# Altium PCB PCB1.PcbDoc
Units mil, origin at the board's own origin, x right, y up, seen from the top; angles counter-clockwise.
Board outline 1515 x 2470 mil, 4 copper layers (Top Layer, GND, VCC, Bottom Layer), stack 23.756 mil thick; 65 components, 50 nets, 226 pads, 151 vias.
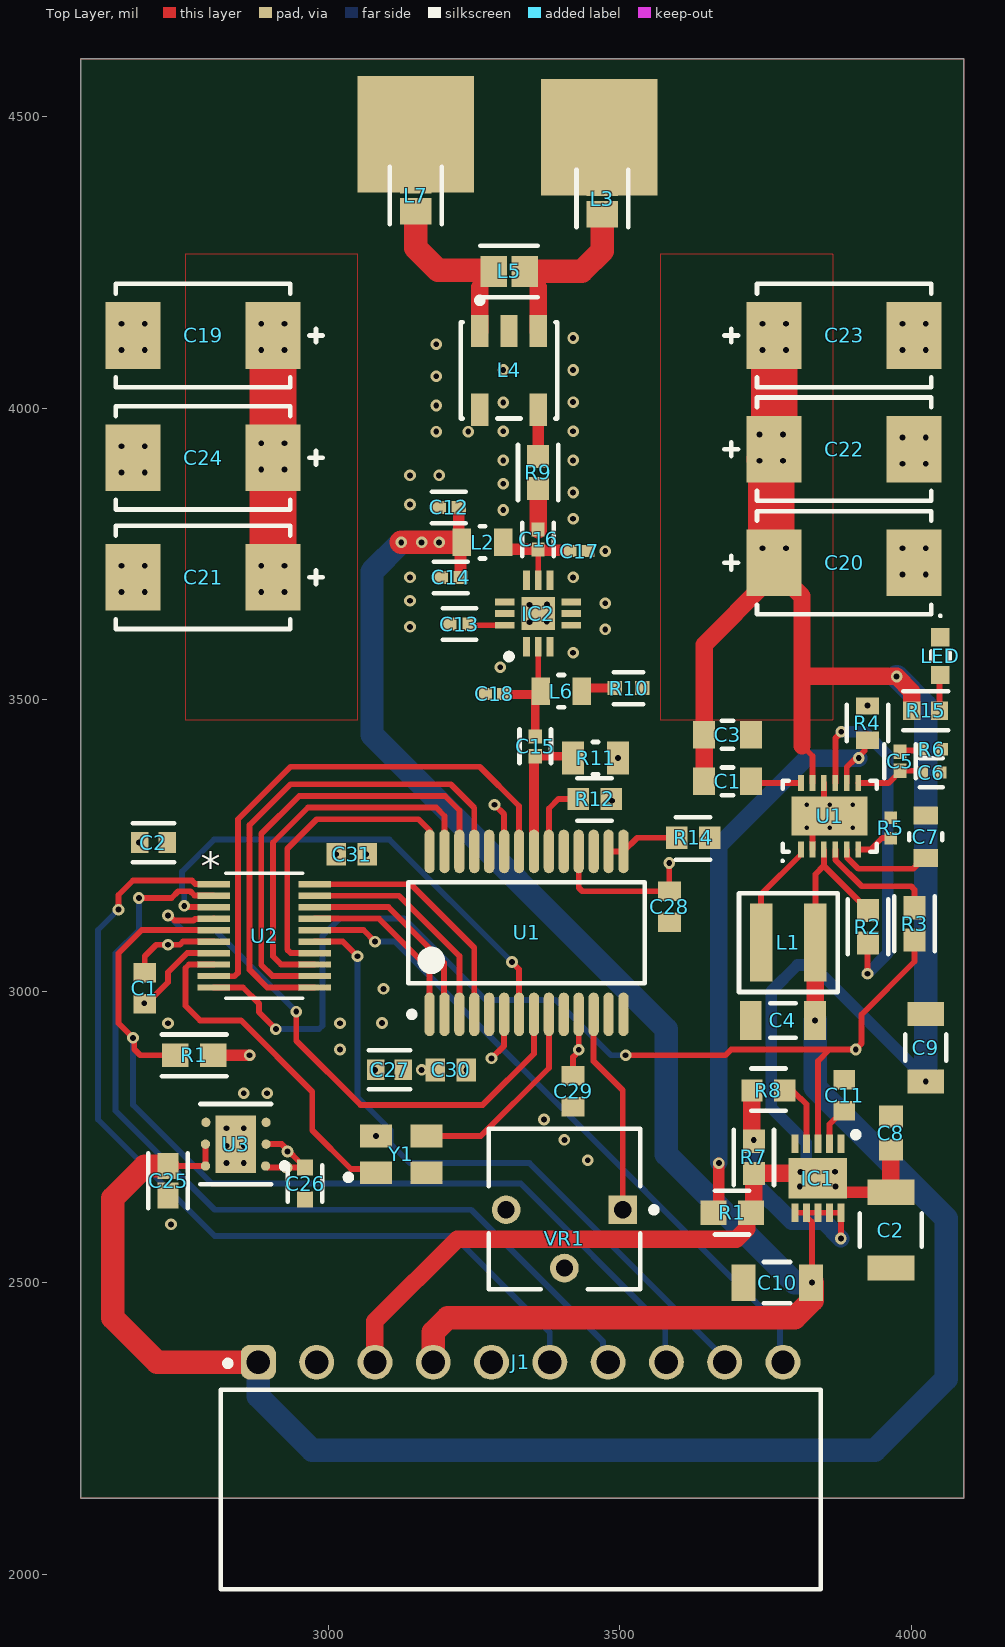
[diagram p0: Top Layer view]
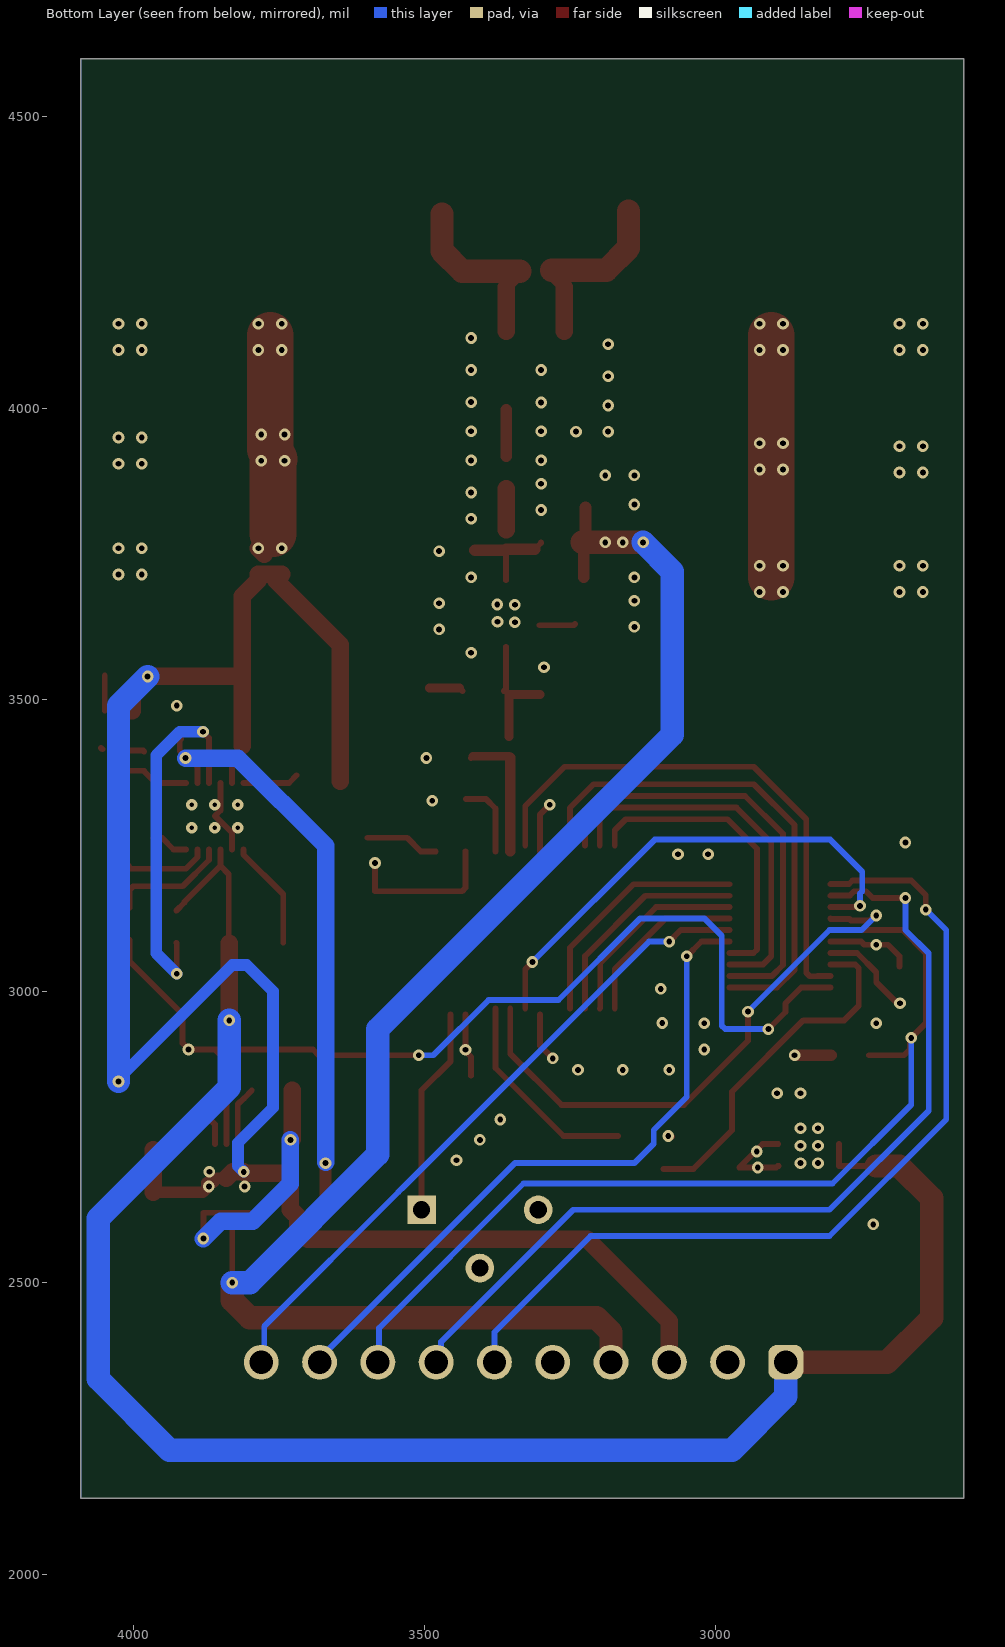
[diagram p1: Bottom Layer view, seen from below]

## Layer stack, top to bottom
Top Solder: solder mask 0.4, Solder Resist, Dk 3.5
Top Layer: signal copper 1.4
Dielectric 2: prepreg 2.8, PP-006, Dk 4.1
GND: signal copper 1.378
Dielectric 1: dielectric 12.6, FR-4, Dk 4.8
VCC: signal copper 1.378
Dielectric 3: prepreg 2.8, PP-006, Dk 4.1
Bottom Layer: signal copper 1.4
Bottom Solder: solder mask 0.4, Solder Resist, Dk 3.5

## Board outline
2575,2130 2575,4600 4090,4600 4090,2130

## Design rules (kind name [scope] priority, off if disabled: settings)
AssemblyTestPointUsage [All] p0: scope1count=1 scope1_0_kind=Board scope1_0_value=Board scope2count=1 scope2_0_kind=Board scope2_0_value=Board commentlength=0
AssemblyTestpoint [All] p0: scope1count=1 scope1_0_kind=Board scope1_0_value=Board scope2count=1 scope2_0_kind=Board scope2_0_value=Board commentlength=0
Clearance [All] p0: scope1count=1 scope1_0_kind=Board scope1_0_value=Board scope2count=1 scope2_0_kind=Board scope2_0_value=Board commentlength=0 gap=10
Clearance [All] p1: gap=10 ignorepadtopadclearanceinfootprint=FALSE except(0: Arc-Hole Track-Hole SMDPad-Hole THPad-Hole Via-Hole Fill-Hole Poly-Hole Region-Hole Text-Hole; 2: SMDPad-SMDPad; 5: Arc-Arc Arc-Track Arc-SMDPad Track-Track Track-SMDPad; 20: Arc-Fill Arc-Poly Arc-Region Track-Fill Track-Poly Track-Region Fill-Fill Fill-Poly Fill-Region Poly-Poly Poly-Region Region-Region)
ComponentClearance [All] p0: scope1count=1 scope1_0_kind=Board scope1_0_value=Board scope2count=1 scope2_0_kind=Board scope2_0_value=Board commentlength=0 gap=10 collisioncheckmode=3
DiffPairsRouting [All] p0: scope1count=1 scope1_0_kind=Board scope1_0_value=Board scope2count=1 scope2_0_kind=Board scope2_0_value=Board commentlength=0
FabricationTestPointUsage [All] p0: scope1count=1 scope1_0_kind=Board scope1_0_value=Board scope2count=1 scope2_0_kind=Board scope2_0_value=Board commentlength=0 valid=0 allowmultiple=FALSE
FabricationTestpoint [All] p0: scope1count=1 scope1_0_kind=Board scope1_0_value=Board scope2count=1 scope2_0_kind=Board scope2_0_value=Board commentlength=0 side=3 testpointundercomponent=TRUE minsize=40 maxsize=100 preferedsize=60 minholesize=0 maxholesize=40 preferedholesize=32 testpointgrid=1
FanoutControl Fanout_BGA [All] p0 off: scope1count=1 scope1_0_kind=Board scope1_0_value=Board scope2count=1 scope2_0_kind=Board scope2_0_value=Board commentlength=69 // Protel DXP Scope 1 Expression Was: IsBGA   Fanout_BGA (Default Rule)
FanoutControl Fanout_LCC [All] p0 off: scope1count=1 scope1_0_kind=Board scope1_0_value=Board scope2count=1 scope2_0_kind=Board scope2_0_value=Board commentlength=69 // Protel DXP Scope 1 Expression Was: IsLCC   Fanout_LCC (Default Rule)
FanoutControl Fanout_SOIC [All] p0 off: scope1count=1 scope1_0_kind=Board scope1_0_value=Board scope2count=1 scope2_0_kind=Board scope2_0_value=Board commentlength=71 // Protel DXP Scope 1 Expression Was: IsSOIC   Fanout_SOIC (Default Rule)
FanoutControl Fanout_Small [All] p0 off: scope1count=1 scope1_0_kind=Board scope1_0_value=Board scope2count=1 scope2_0_kind=Board scope2_0_value=Board commentlength=84 // Protel DXP Scope 1 Expression Was: (CompPinCount < 5)   Fanout_Small (Default Rule)
FanoutControl Fanout_Default [All] p0: scope1count=1 scope1_0_kind=Board scope1_0_value=Board scope2count=1 scope2_0_kind=Board scope2_0_value=Board commentlength=30 // Fanout_Default (Default Rule)
Height [All] p0: scope1count=1 scope1_0_kind=Board scope1_0_value=Board scope2count=1 scope2_0_kind=Board scope2_0_value=Board commentlength=0
HoleSize [All] p0: scope1count=1 scope1_0_kind=Board scope1_0_value=Board scope2count=1 scope2_0_kind=Board scope2_0_value=Board commentlength=0 absolutevalues=TRUE maxlimit=100 minlimit=1 maxpercent=80.000 minpercent=20.000
HoleToHoleClearance [All] p0: scope1count=1 scope1_0_kind=Board scope1_0_value=Board scope2count=1 scope2_0_kind=Board scope2_0_value=Board commentlength=0
LayerPairs [All] p0: scope1count=1 scope1_0_kind=Board scope1_0_value=Board scope2count=1 scope2_0_kind=Board scope2_0_value=Board commentlength=0 enforce=TRUE
MinimumSolderMaskSliver [All] p0: scope1count=1 scope1_0_kind=Board scope1_0_value=Board scope2count=1 scope2_0_kind=Board scope2_0_value=Board commentlength=0
NetAntennae [All] p0: scope1count=1 scope1_0_kind=Board scope1_0_value=Board scope2count=1 scope2_0_kind=Board scope2_0_value=Board commentlength=0
PasteMaskExpansion [All] p0: scope1count=1 scope1_0_kind=Board scope1_0_value=Board scope2count=1 scope2_0_kind=Board scope2_0_value=Board commentlength=0 expansion=0
PlaneClearance [All] p0: scope1count=1 scope1_0_kind=Board scope1_0_value=Board scope2count=1 scope2_0_kind=Board scope2_0_value=Board commentlength=0 clearance=40
PlaneClearance [All] p1: clearance=40
PlaneConnect [All] p0: scope1count=1 scope1_0_kind=Board scope1_0_value=Board scope2count=1 scope2_0_kind=Board scope2_0_value=Board commentlength=0 planeconnectstyle=Relief reliefexpansion=20 reliefentries=4 reliefconductorwidth=10 reliefairgap=10
PolygonConnect [All] p0: scope1count=1 scope1_0_kind=Board scope1_0_value=Board scope2count=1 scope2_0_kind=Board scope2_0_value=Board commentlength=0 connectstyle=Direct reliefconductorwidth=10 reliefentries=4 polygonreliefangle="90 Angle"
PolygonConnect [All] p1: connectstyle=Direct reliefconductorwidth=10 reliefentries=4 polygonreliefangle="90 Angle" airgapwidth=10
RoutingCorners [All] p0: scope1count=1 scope1_0_kind=Board scope1_0_value=Board scope2count=1 scope2_0_kind=Board scope2_0_value=Board commentlength=0 cornerstyle=45-Degree minsetback=100 maxsetback=100
RoutingLayers [All] p0: scope1count=1 scope1_0_kind=Board scope1_0_value=Board scope2count=1 scope2_0_kind=Board scope2_0_value=Board commentlength=0 top layer=Automatic mid layer 1=Automatic mid layer 2=Automatic bottom layer=Automatic
RoutingPriority [All] p0: scope1count=1 scope1_0_kind=Board scope1_0_value=Board scope2count=1 scope2_0_kind=Board scope2_0_value=Board commentlength=0
RoutingTopology [All] p0: scope1count=1 scope1_0_kind=Board scope1_0_value=Board scope2count=1 scope2_0_kind=Board scope2_0_value=Board commentlength=0 topology=Shortest
RoutingVias [All] p0: scope1count=1 scope1_0_kind=Board scope1_0_value=Board scope2count=1 scope2_0_kind=Board scope2_0_value=Board commentlength=0 holewidth=28 width=50 viastyle="Through Hole" minholewidth=28 minwidth=50 maxholewidth=28 maxwidth=50
RoutingVias [All] p1: holewidth=28 width=50 viastyle="Through Hole" minholewidth=28 minwidth=50 maxholewidth=28 maxwidth=50
ShortCircuit [All] p0: scope1count=1 scope1_0_kind=Board scope1_0_value=Board scope2count=1 scope2_0_kind=Board scope2_0_value=Board commentlength=0 allowed=FALSE
SilkToBoardRegionClearance [All] p0: scope1count=1 scope1_0_kind=Board scope1_0_value=Board scope2count=1 scope2_0_kind=Board scope2_0_value=Board commentlength=0
SilkToSilkClearance [All] p0: scope1count=1 scope1_0_kind=Board scope1_0_value=Board scope2count=1 scope2_0_kind=Board scope2_0_value=Board commentlength=0
SilkToSolderMaskClearance [All] p0 off: scope1count=1 scope1_0_kind=Board scope1_0_value=Board scope2count=1 scope2_0_kind=Board scope2_0_value=Board commentlength=44 // Protel DXP Scope 1 Expression Was: IsPad
SolderMaskExpansion [All] p0: scope1count=1 scope1_0_kind=Board scope1_0_value=Board scope2count=1 scope2_0_kind=Board scope2_0_value=Board commentlength=0 expansion=4
SolderMaskExpansion [All] p1: expansion=4 istentingtop=FALSE
UnRoutedNet [All] p0: scope1count=1 scope1_0_kind=Board scope1_0_value=Board scope2count=1 scope2_0_kind=Board scope2_0_value=Board commentlength=0
UnpouredPolygon [All] p0: scope1count=1 scope1_0_kind=Board scope1_0_value=Board scope2count=1 scope2_0_kind=Board scope2_0_value=Board commentlength=0
Width [All] p0: scope1count=1 scope1_0_kind=Board scope1_0_value=Board scope2count=1 scope2_0_kind=Board scope2_0_value=Board commentlength=0 maxlimit=80 minlimit=10 preferedwidth=10
Width [All] p1: maxlimit=80 minlimit=10 preferedwidth=10
29 further rules are at their usual default settings.

## Classes and differential pairs
component class U_MCU+DDS: C1 C2 C27 C28 C29 C30 C31 R1 R14 U1 U2 VR1 Y1
component class System: J1 R11 R12
component class U_Power: C1 C2 C3 C4 C5 C6 C7 C8 C9 C10 C11 C19 C20 C21 C22 C23 C24 C25 C26 IC1 L1 LED R1 R2 R3 R4 R5 R6 R7 R8 R15 U1 U3
component class U_PA: C12 C13 C14 C15 C16 C17 C18 IC2 L2 L3 L4 L5 L6 L7 R9 R10

## Components (designator, comment, footprint, x,y, rotation, side; value= is the part's Value field where it differs from the comment)
C1 "CGA3E2X7R1H104K080AE" FP-CGA3E-0_3-0_1-IPC_A 3685,3360 r0 top
C1 "VJ0603Y104KXJAP" CAPC1608X92X38NL15T08 2685,3005 r90 top
C2 "GRM32ER61E226KE15L" FP-GRM32-MFG 3965,2590.04 r270 top
C2 "C0603C106M8PACTU" FP-C0603C106M8PACTU-MFG 2700,3255 r0 top
C3 "CGA3E1X7R1E105K080AC" FP-CGA3E-0_3-0_1-IPC_A 3685,3440 r0 top
C4 "CAP 10uF 10V 1206(3216)" CAPC1206(3216)190_L 3780,2950 r0 top
C5 "C1005X7R1H331K050BA" FP-C1005-050-0_05-IPC_B 3980.79,3394.63 r90 top
C6 "C0402C100J5GACTU" FP-C0402-BB-MFG 4034.25,3375 r0 top
C7 "C2012X5R1E475K125AB" FP-C2012-125-0_2-MFG 4025,3265 r90 top
C8 "GRM188R71E105KA12D" CAPC1608X90X35ML10T15 3965,2756.46 r270 top
C9 "GRM31CR71E106KA12L" FP-GRM31C-0_2-e0_3_0_8-MFG 4025,2903.07 r90 top
C10 "GRM31CR71E106KA12L" FP-GRM31C-0_2-e0_3_0_8-MFG 3770,2500 r180 top
C11 "DNP" CAPC1608X90X35NL10T15 3885,2821.57 r270 top
C12 "GRM155R71H104KE14D" FP-GRM155-0_05-IPC_B 3206.87,3830 r0 top
C13 "GRM155R71H104KE14D" FP-GRM155-0_05-IPC_B 3225,3630 r0 top
C14 "GRM1555C1H102JA01D" FP-GRM155-0_05-IPC_B 3210,3710 r0 top
C15 "GRM1555C1H102JA01D" FP-GRM155-0_05-IPC_B 3355,3420 r90 top
C16 "GRM1555C1H102JA01D" FP-GRM155-0_05-IPC_B 3360,3775 r90 top
C17 "GRM1555C1HR40WA01D" CAPC1005X55X25LL05T10 3430.35,3755 r180 top
C18 "GRM1555C1HR40WA01D" CAPC1005X55X25LL05T10 3285,3510 r0 top
C19 "16TQC220MD3" FP-POSCAP-D3L-MFG 2785,4125 r0 top
C20 "16TQC220MD3" FP-POSCAP-D3L-MFG 3885,3735 r180 top
C21 "16TQC220MD3" FP-POSCAP-D3L-MFG 2785,3710 r0 top
C22 "16TQC220MD3" FP-POSCAP-D3L-MFG 3885,3930 r180 top
C23 "16TQC220MD3" FP-POSCAP-D3L-MFG 3885,4125 r180 top
C24 "16TQC220MD3" FP-POSCAP-D3L-MFG 2785,3915 r0 top
C25 "C1608X5R1H105K080AB" FP-C1608-080-0_1-IPC_B 2725,2674.78 r270 top
C26 "C1608X5R1A106K080AC" FP-C1608-080-0_1-MFG 2960,2670 r90 top
C27 "C0603C106M8PACTU" FP-C0603C106M8PACTU-MFG 3105,2865 r0 top
C28 "VJ0603Y104KXJAP" CAPC1608X92X38NL15T08 3585,3145 r90 top
C29 "VJ0603Y104KXJAP" CAPC1608X92X38NL15T08 3420,2828.43 r90 top
C30 "VJ0603Y104KXJAP" CAPC1608X92X38NL15T08 3210,2865 r0 top
C31 "VJ0603Y104KXJAP" CAPC1608X92X38NL15T08 3040,3235 r0 top
IC1 "MP5000ADQ-LF-P" SON50P300X300X100-11N-D 3840,2679.06 r270 top
IC2 "PMA3-43-1W+" QFN51P300X300X89-13N 3360.08,3647.91 r90 top
J1 "613010143121" 613010143121 3330,2145 r0 top
L1 "XAL4030-472MEC" FP-XAL4030-472MEC-MFG 3789.13,3083.23 r180 top
L2 "LQW21HN1R5J00L" FP-LQW21HN_00-MFG 3264.57,3770 r180 top
L3 "MLZ2012M1R0HTD25" FP-MLZ2012-1_25-IPC_C 3470,4360 r90 top
L4 "MABAES0060" FP-MABAES0060-MFG 3310,4065 r90 top
L5 "MLZ2012M1R0HTD25" FP-MLZ2012-1_25-IPC_C 3310,4235 r0 top
L6 "LQW21HN1R5J00L" FP-LQW21HN_00-MFG 3399.57,3515 r180 top
L7 "MLZ2012M1R0HTD25" FP-MLZ2012-1_25-IPC_C 3150,4365 r270 top
LED "XZCM2CRK53WA-8VF" XZCFBB53W8VF 4050,3575 r270 top
R1 "CRCW06031M02FKEA" FP-CRCW0603-e3-IPC_A 3692.9,2620 r0 top
R1 "ESR03EZPF3301" FP-ESR03-IPC_A 2770,2890 r0 top
R2 "RMCF0603ZG0R00" FP-RMCF0603-IPC_B 3925.79,3110.63 r270 top
R3 "RMCF0603ZG0R00" FP-RMCF0603-IPC_B 4005.79,3115.63 r90 top
R4 "CRCW0603113KFKEC" FP-CRCW0603-e3-MFG 3925,3460 r270 top
R5 "ERJ-2RKF5762X" RESC1005X40X25NL05T05 3965,3280 r270 top
R6 "CRCW040286K6FKED" RESC1005X40X25NL05T05 4035,3415 r180 top
R7 "DNP" FP-RMCF0603-IPC_B 3730,2715 r90 top
R8 "CRCW060322R0FKEA" FP-CRCW0603-e3-IPC_B 3755,2830 r180 top
R9 "RMCF0603ZG0R00" FP-RMCF0603-IPC_B 3360,3890 r90 top
R10 "FCHP0402E50R0BBT1" FP-FC0402-MFG 3515,3520 r180 top
R11 "CRCW080550R0FKTA" FP-D12-CRCW0805-MFG 3458.39,3400 r0 top
R12 "CRCW060325R0FKEA" FP-CRCW0603-e3-IPC_B 3456.83,3330 r0 top
R14 "100Ohm 0603" FP-CRCW0603-e3-IPC_B 3625.91,3263.25 r0 top
R15 "TFCR0603-10W-E-5001BT" FP-TFCR0603-IPC_C 4024.92,3481.11 r180 top
U1 "AD9850BRSZ-REEL" ADI-RS-28_N 3340,3100 r90 top
U1 "LTC3122EDE#PBF" LT-DE-UE-12_V 3860,3300.31 r90 top
U2 "MSPM0C1104SDGS20R" DGS0020A_TEX 2890,3095 r0 top
U3 "LD39200PU33R" FP-DFN6-7946637-MFG 2841.18,2737.6 r180 top
VR1 "3362P-1-103LF" BOUR-3362P 3405,2626.38 r180 top
Y1 "830207044109" WE-SPXO_CFPS-39 3125,2720 r0 top

## Footprints (in the part's own frame and the unit in brackets; to place one, negate y for a bottom-side part, rotate by r counter-clockwise, add the part's x,y. Pads: shape width x height; smd on the part's side, far side on the other; paste and mask are expansions set on the pad)
613010143121 [mm] "Socket Header, Pitch 2.54 mm, THT, Angled, single row, 10p"
  rrect50% 1.52x1.52 hole 1.02: 1(-11.43,5.55)
  round 1.52 hole 1.02: 2(-8.89,5.55) 3(-6.35,5.55) 4(-3.81,5.55) 5(-1.27,5.55) 6(1.27,5.55) 7(3.81,5.55) 8(6.35,5.55) 9(8.89,5.55) 10(11.43,5.55)
  silkscreen extent -13.08,-4.35 13.08,5.62
ADI-RS-28_N [mm] "SOP, 28-Leads, Body 10.2x5.3mm, Pitch 0.65mm, IPC Medium Density"
  oval 1.9x0.45 smd: 1(-3.55,4.225) 2(-3.55,3.575) 3(-3.55,2.925) 4(-3.55,2.275) 5(-3.55,1.625) 6(-3.55,0.975) 7(-3.55,0.325) 8(-3.55,-0.325) 9(-3.55,-0.975) 10(-3.55,-1.625) 11(-3.55,-2.275) 12(-3.55,-2.925) 13(-3.55,-3.575) 14(-3.55,-4.225) 15(3.55,-4.225) 16(3.55,-3.575) 17(3.55,-2.925) 18(3.55,-2.275) 19(3.55,-1.625) 20(3.55,-0.975) 21(3.55,-0.325) 22(3.55,0.325) 23(3.55,0.975) 24(3.55,1.625) 25(3.55,2.275) 26(3.55,2.925) 27(3.55,3.575) 28(3.55,4.225)
  silkscreen extent -3.67,-5.15 2.2,5.15
BOUR-3362P [mm] "THD, 3-Leads, Body 6.6x6.99mm, Pitch 2.54mm"
  rect 1.25x1.25 hole 0.75: 1(-2.54,0.035)
  round 1.25 hole 0.75: 2(0,2.575) 3(2.54,0.035)
  silkscreen extent -4.03,-3.49 3.3,3.5
CAPC1005X55X25LL05T10 [mm] "Chip Capacitor, 2-Leads, Body 1.00x0.50mm, IPC High Density"
  rect 0.56x0.52 smd: 1(-0.39,0) 2(0.39,0)
CAPC1206(3216)190_L [mm] "Chip Capacitor, Body 3.2x1.6mm, Height 1.9mm, IPC High Density"
  rect 0.95x1.7 smd: 1(-1.4,0) 2(1.4,0)
  silkscreen extent -0.55,-0.75 0.55,0.75
CAPC1608X90X35ML10T15 [mm] "Chip Capacitor, 2-Leads, Body 1.60x0.80mm, IPC Low Density"
  rect 0.95x1.05 smd: 1(-0.725,0) 2(0.725,0)
CAPC1608X90X35NL10T15 [mm] "Chip Capacitor, 2-Leads, Body 1.60x0.80mm, IPC Medium Density"
  rect 0.85x0.95 smd: 1(-0.675,0) 2(0.675,0)
CAPC1608X92X38NL15T08 [mm] "Chip Capacitor, 2-Leads, Body 1.60x0.80mm, IPC Medium Density"
  rect 0.85x1 smd: 1(-0.675,0) 2(0.675,0)
DGS0020A_TEX [mil]
  rect 56x11 smd paste+0 mask+0: 1(-86.5,88.58) 2(-86.5,68.9) 3(-86.5,49.21) 4(-86.5,29.53) 5(-86.5,9.84) 6(-86.5,-9.84) 7(-86.5,-29.53) 8(-86.5,-49.21) 9(-86.5,-68.9) 10(-86.5,-88.58) 11(86.5,-88.58) 12(86.5,-68.9) 13(86.5,-49.21) 14(86.5,-29.53) 15(86.5,-9.84) 16(86.5,9.84) 17(86.5,29.53) 18(86.5,49.21) 19(86.5,68.9) 20(86.5,88.58)
  silkscreen extent -66,-108 66,108
FP-C0402-BB-MFG [mm]
  rect 0.52x0.52 smd paste+0 mask+0: 1(-0.4,0) 2(0.4,0)
  silkscreen extent -0.5,-0.64 0.5,0.64
FP-C0603C106M8PACTU-MFG [mm]
  rect 0.75x0.9 smd paste+0 mask+0: 1(-0.6,0) 2(0.6,0)
  silkscreen extent -0.9,-0.85 0.9,0.85
FP-C1005-050-0_05-IPC_B [mil]
  rect 25.17x22.54 smd paste+0 mask+0: 1(-16.4,0) 2(16.4,0)
  silkscreen extent -29,-27 29,27
FP-C1608-080-0_1-IPC_B [mil]
  rect 44.53x35.91 smd paste+0 mask+0: 1(-25.22,0) 2(25.22,0)
  silkscreen extent -47,-34 47,34
FP-C1608-080-0_1-MFG [mm]
  rect 0.7x0.7 smd paste+0 mask+0: 1(-0.7,0) 2(0.7,0)
  silkscreen extent -0.8,-0.75 0.8,0.75
FP-C2012-125-0_2-MFG [mm]
  rect 0.8x1.05 smd paste+0 mask+0: 1(-0.925,0) 2(0.925,0)
  silkscreen extent -0.15,-0.72 0.15,0.72
FP-CGA3E-0_3-0_1-IPC_A [mm]
  rect 0.956x1.206 smd paste+0 mask+0: 1(-1.025,0) 2(1.025,0)
  silkscreen extent -0.25,-0.6 0.25,0.6
FP-CRCW0603-e3-IPC_A [mil]
  rect 44.69x41.82 smd paste+0 mask+0: 1(-32.1,0) 2(32.1,0)
  silkscreen extent -30,-37 30,37
FP-CRCW0603-e3-IPC_B [mil]
  rect 36.81x37.88 smd paste+0 mask+0: 1(-28.17,0) 2(28.17,0)
  silkscreen extent -30,-37 30,35
FP-CRCW0603-e3-MFG [mm]
  rect 0.75x1 smd paste+0 mask+0: 1(-0.75,0) 2(0.75,0)
  silkscreen extent -0.8,-0.9 0.8,0.9
FP-D12-CRCW0805-MFG [mm]
  rect 0.95x1.45 smd paste+0 mask+0: 1(-0.975,0) 2(0.975,0)
  silkscreen extent -0.13,-0.7 0.13,0.7
FP-DFN6-7946637-MFG [mm]
  round 0.405 smd paste+0 mask+0: 1(-1.3,0.95) 2(-1.321,0) 3(-1.321,-0.95) 4(1.3,-0.95) 5(1.321,0) 6(1.321,0.95)
  rect 1.75x2.5 smd paste+0 mask+0: 7(0,0)
  silkscreen extent -2.25,-1.75 1.55,1.75
FP-ESR03-IPC_A [mil]
  rect 45.6x39.85 smd paste+0 mask+0: 1(-32.56,0) 2(32.56,0)
  silkscreen extent -55,-36 55,36
FP-FC0402-MFG [mm]
  rect 0.635x0.61 smd paste+0 mask+0: 1(-0.597,0) 2(0.597,0)
  silkscreen extent -0.64,-0.7 0.64,0.7
FP-GRM31C-0_2-e0_3_0_8-MFG [mm]
  rect 1.05x1.6 smd paste+0 mask+0: 1(-1.475,0) 2(1.475,0)
  silkscreen extent -0.58,-0.9 0.58,0.9
FP-GRM32-MFG [mm]
  rect 1.1x2.05 smd paste+0 mask+0: 1(-1.65,0) 2(1.65,0)
  silkscreen extent -0.72,-1.35 0.72,1.35
FP-GRM155-0_05-IPC_B [mil]
  rect 24.23x22.54 smd paste+0 mask+0: 1(-16.87,0) 2(16.87,0)
  silkscreen extent -29,-27 29,27
FP-LQW21HN_00-MFG [mm]
  rect 0.8x1.2 smd paste+0 mask+0: 1(-0.9,0) 2(0.9,0)
  silkscreen extent -0.13,-0.7 0.13,0.7
FP-MABAES0060-MFG [mm]
  rect 1.4x0.76 smd paste+0 mask+0: 1(1.715,1.27) 2(1.715,0) 3(1.715,-1.27) 4(-1.715,-1.27) 5(-1.715,1.27)
  silkscreen extent -2.09,-2.09 3.18,2.09
FP-MLZ2012-1_25-IPC_C [mil]
  rect 45.45x53.39 smd paste+0 mask+0: 1(-26.61,0) 2(26.61,0)
  silkscreen extent -49,-44 49,44
FP-POSCAP-D3L-MFG [mm]
  rect 2.4x2.9 smd paste+0 mask+0: 1(-3.05,0) 2(3.05,0)
  silkscreen extent -3.8,-2.25 5.23,2.25
FP-RMCF0603-IPC_B [mil]
  rect 39.61x37.73 smd paste+0 mask+0: 1(-27.6,0) 2(27.6,0)
  silkscreen extent -47,-35 47,35
FP-TFCR0603-IPC_C [mil]
  rect 29.85x31.97 smd paste+0 mask+0: 1(-23.7,0) 2(23.7,0)
  silkscreen extent -39,-33 39,33
FP-XAL4030-472MEC-MFG [mm]
  rect 0.98x3.4 smd paste+0 mask+0: 1(-1.185,0) 2(1.185,0)
  silkscreen extent -2.15,-2.15 2.15,2.15
LT-DE-UE-12_V [mm] "SON, 12-Leads, Body 4x3mm, Pitch 0.5mm, Thermal Pad 3.3x1.7mm"
  rect 0.7x0.25 smd: 1(-1.45,1.25) 2(-1.45,0.75) 3(-1.45,0.25) 4(-1.45,-0.25) 5(-1.45,-0.75) 6(-1.45,-1.25) 7(1.45,-1.25) 8(1.45,-0.75) 9(1.45,-0.25) 10(1.45,0.25) 11(1.45,0.75) 12(1.45,1.25)
  rect 1.7x3.3 smd: 13(0,0)
  silkscreen extent -2,-2.05 1.55,2.1
QFN51P300X300X89-13N [mm]
  rect 0.85x0.3 smd: 1(-1.45,0.51) 2(-1.45,0) 3(-1.45,-0.51) 7(1.45,-0.51) 8(1.45,0) 9(1.45,0.51)
  rect 0.3x0.85 smd: 4(-0.51,-1.45) 5(0,-1.45) 6(0.51,-1.45) 10(0.51,1.45) 11(0,1.45) 12(-0.51,1.45)
  rect 1.45x1.45 smd: 13(0,0)
  silkscreen extent -2,1.15 -1.75,1.4
RESC1005X40X25NL05T05 [mm] "Chip Resistor, 2-Leads, Body 1.00x0.50mm, IPC Medium Density"
  rect 0.55x0.55 smd: 1(-0.45,0) 2(0.45,0)
SON50P300X300X100-11N-D [mm]
  rect 0.8x0.3 smd: 1(-1.5,1) 2(-1.5,0.5) 3(-1.5,0) 4(-1.5,-0.5) 5(-1.5,-1) 6(1.5,-1) 7(1.5,-0.5) 8(1.5,0) 9(1.5,0.5) 10(1.5,1)
  rect 1.75x2.55 smd: 11(0,0)
  silkscreen extent -2.02,1.53 -1.78,1.78
WE-SPXO_CFPS-39 [mm] "Simple Packaged Quartz Oscillator, body 3.2x2.5mm"
  rect 1.4x1 smd: 1(-1.1,-0.8) 2(1.1,-0.8) 3(1.1,0.8) 4(-1.1,0.8)
  silkscreen extent -2.42,-1.12 -2.17,-0.88
XZCFBB53W8VF [mm]
  rect 0.8x0.8 smd: 1(-0.825,0) 2(0.825,0)
  silkscreen extent -1.8,-0.4 0.2,0.4

## Part data
C1: library part CMP-08246-002410-1, "Cap Ceramic 100nF 50V X7R 10% Pad SMD 0603 +125°C Automotive T/R"
C1 C28 C29 C30 C31: library part CMP-2006-01211-1
C2: library part CMP-2000-05458-2, "CAP CER 22UF 25V X5R 1210"
C2 C27: library part CMP-03020-034654-1, "CAP CER 10UF 10V X5R 0603"
C3: library part CMP-08246-001507-1, "Cap Ceramic 1uF 25V X7R 10% Pad SMD 0603 +125°C Automotive T/R"
C4: library part CMP-1037-04967-1, "CAP 10uF 10V ±10% 1206 (3216 Metric) Thickness 1.9mm SMD"
C5: library part CMP-08246-002681-1, "Multilayer Ceramic Capacitors 330pF ±10% 50V X7R SMD 0402"
C6: library part CMP-2008-03404-2, "Multilayer Ceramic Capacitor, C Series, 10 Pf, - 5%, C0G / Np0, 50 V, 0402 [1005 Metric] Rohs Compliant: Yes"
C7: library part CMP-08246-004908-1, "Multilayer Ceramic Capacitors 4.7µF ±10% 25V X5R SMD 0805"
C8: library part CMP-2006-02460-1
C9 C10: library part CMP-06035-003589-1, "Chip Multilayer Ceramic Capacitors for General Purpose, 1206, 10uF, X7R, 15%, 10%, 25V"
C11: library part CMP-2006-02680-1, "GRM1885C1H560JA01D"
C12 C13: library part CMP-2008-04639-2, "Chip Multilayer Ceramic Capacitors for General Purpose, 0402, 0.10uF, X7R, 15%, 10%, 50V"
C14 C15 C16: library part CMP-2008-04254-2, "Chip Multilayer Ceramic Capacitors for General Purpose, 0402, 1000pF, C0G, 30ppm/°C, 5%, 50V"
C17 C18: library part CMP-1034-00010-2
C19 C20 C21 C22 C23 C24: library part CMP-05428-000297-1, "Molded Tantalum Polymer Capacitor 220uF 20% 16V life 2000Hours SMD 2917"
C25: library part CMP-2000-06025-2, "Multilayer Ceramic Capacitors 1µF ±10% 50V X5R SMD 0603"
C26: library part CMP-2000-04979-3, "Multilayer Ceramic Capacitors 10µF ±10% 10V X5R SMD 0603"
IC1 IC2: "Integrated Circuit"
J1: library part CMP-1502-01419-3
L1: library part CMP-11268-000082-1, "Power Inductor (SMD), 4.7 µH, 5.1 A, Shielded, 4.5 A, XAL40xx Series, 4mm x 4mm x 3.1mm"
L2 L6: library part CMP-06042-001639-1, "Wire Wound Ferrite type RF Inuctor 1.5uH ±5% 85mA 5.33? 0805 (2012)"
L3 L5 L7: library part CMP-08253-000383-1, "Shielded Multilayer Inductor 1uH ±20% 800mA 130m? AEC-Q200 SMD 0805"
L4: library part CMP-97513-000003-1, "BALUN 300KHZ-200MHZ 1:1 6SMD"
LED: "LED"
R1: library part CMP-2000-03018-2, "RES Thick Film, 1.02M?, 1%, 0.1W, 100ppm/°C, 0603"
R1: library part CMP-08839-028747-1, "3.3k? ±1% 0.25W 0603 Anti-Surge Chip Resistor AEC-Q200"
R2 R3 R9: library part CMP-26527-006412-1, "0? ±0 0.1W 0603 Thick Film Chip Resistor AEC-Q200 compliant"
R4: library part CMP-02407-003381-1, "RES Thick Film, 113k?, 1%, 0.1W, 100ppm/°C, 0603"
R5: library part CMP-2002-01001-1
R6: library part CMP-2002-00247-1
R7: library part CMP-26527-006412-1
R8: library part CMP-2000-03097-2, "RES Thick Film, 22?, 1%, 0.1W, 100ppm/°C, 0603"
R10: library part CMP-05494-120702529-1, "FCHP0402E50R0BBT1 SMD Chip Resistor, 50 Ohm, ± 0.1%, 1 W, 0402 [1005 Metric], Thin Film, High Frequency"
R11: library part CMP-00030-21390498-1, "CRCW080550R0FKTA Res Thick Film 0805 50 Ohm 1% 0.125W(1/8W) ±100ppm/C Pad SMD Automotive T/R"
R12: library part CMP-02407-008643-1, "RES Thick Film, 25?, 1%, 0.1W, 100ppm/°C, 0603"
R14: library part CMP-2000-03097-2
R15: library part CMP-250906-228113-1, "RES Thin Film,  4k?, 0.1%, 0.1W, 25ppm/°C, 0603"
U1: library part CMP-0293-00041-1, "CMOS, 125 MHz Complete DDS Synthesizer, 10-Bit, Parallel, Serial, RS-28, 1500 Reel, Pb-Free"
U1: library part CMP-0492-00369-1, "2.5 A Synchronous Step-Up DC/DC Converter with Output Disconnect, 12-pin SON (DE-UE-12), -40 to 125 degC, Pb-Free"
U2: "24MHz Arm® Cortex®-M0+ MCU with 16KB flash, 1KB SRAM, 12-bit ADC 20-VSSOP -40 to 125"
U3: library part CMP-12153-000011-1, "IC REG LINEAR 3.3V 2A 6DFN"
VR1: library part CMP-1747-00004-1, "Square Trimpot(R) Trimming Potentiometer, 10 KOhm, 300 V, -55 to 125 degC, 3-Pin THD, RoHS, Tube"
Y1: library part CMP-03913-116855802-1, "830207044109 WE-SPXO Crystal Oscillator"

## Free pads (board coordinates)
  rect 200x200 smd: 2(3150,4470) 2(3465,4465)

## Via types
v1: diameter 20, hole 10, Top Layer to Bottom Layer, tented both sides, 145 vias
v2: diameter 19.68, hole 7.87, Top Layer to Bottom Layer, 6 vias

## Nets (pads, with @x,y where several pads share a name; then routed paths per layer and width w, separated by ;. In a path a pad name is that pad's centre, name@x,y a point inside that pad or via, vN(x,y) a via of type N, cw(c..) or ccw(c..) an arc to the next point about the centre after c; other vN are vias at no path point)
3V3: C1.2@2685,3031.57 C2.1@2676.38,3255 C26.2 C27.1 C28.2 C29.2 C30.2 C31.2 J1.2 R1.2@2802.56,2890 U1.6@3301.61,2960.24 U1.11@3429.57,2960.24 U1.18 U1.23 U2.6 U3.1 U3.2 Y1.4 | length 921.6
  Top Layer w10: C1.2@2685,3042.4 2685,3060 2704.84,3079.84 2745.49,3079.84 2750.81,3085.16 U2.6 ; v1(2725,3079.84) v1@2727.58,3082.42 ; U3.1 2893.97,2700.2 2896.61,2697.56 v1(2928.3,2697.56) C26.2 2919.96,2737.6 U3.2 ; Y1.4@3075,2750.32 3080.51,2750.32 v1(3081.69,2751.5) ; v1(3279.89,2884.75) 3301.61,2906.48 U1.6@3301.61,2960.24 ; v1(3285,3320) 3301.61,3303.39 U1.23 ; C29.2 3420,2887.29 3429.57,2896.86 v1(3429.57,2899.57) U1.11@3429.57,2960.24 ; U1.18@3429.78,3239.98 U1.18 3429.57,3177.43 3435.42,3171.57 C28.2 v1(3585,3220)
  Top Layer w20: R1.2@2802.56,2890 v1(2865,2890)
  other v1: 2930,2725 3080,2865 3236.57,2865 3065,3235 2675,3255
12V: C1.1@3644.65,3360 C2.1@3965,2655 C3.1 C8.2 C9.1 C19.2 C20.2 C21.2 C22.2 C23.2 C24.2 IC1.11 J1.3 R1.2@3725,2620 R7.1 R15.2 U1.11@3830.47,3357.4 | length 4467.7
  Top Layer w10: 3812.64,3421.46 3830.47,3403.62 U1.11@3830.47,3357.4 ; IC1.11@3855.94,2679.06 v1(3870,2665) 3868.65,2666.35 3868.65,2689.86 v1(3869.1,2690.31)
  Top Layer w20: IC1.11 3855.94,2679.06 3863.55,2671.45 3873.75,2671.45 3873.75,2661.45 3880.2,2655 C2.1@3965,2655
  Top Layer w30: J1.3 3080,2433.56 3221.04,2574.61 3384.45,2574.61 3700.08,2574.61 3717.66,2592.18 3717.66,2614.09 3723.56,2620 3725,2620 3730,2625 R7.1 3807.4,2687.4 v1(3810,2690) 3829.06,2690 IC1.11 ; C1.1@3644.65,3360 C3.1 3644.65,3594.65 C20.2@3755,3705 ; C20.2@3745,3715 3785,3715 3785,3705.08 3812.64,3677.44 3812.64,3540 ; C20.2@3774.96,3749.96 v1(3785,3760) ; 3812.64,3421.46 3812.64,3540 ; C2.1@3965,2655 C8.2 ; R15.2 4001.22,3513.78 v1(3975,3540) 3812.64,3540
  Top Layer w80: C21.2 C24.2 C19.2 ; C22.2@3757.68,3912.91 3760,3912.91 C20.2@3760,3785 ; C22.2 C23.2
  Bottom Layer w20: v1(3810,2690) 3820,2700 3820,2740 3760,2800 3760,3000 3805,3045 3830,3045 4025,2850 v1(4025,2845)
  Bottom Layer w40: v1(3975,3540) 4025,3490 v1(4025,2845)
  other v1: 3808.65,2665 2885,3685 2925,3685 2885,3730 2925,3730 3745,3760 2885,3895 2925,3895 3740,3910 3780,3910 2885,3940 2925,3940 3740,3955 3780,3955 2885,4100 2925,4100 3745,4100 3785,4100 2885,4145 2925,4145 3745,4145 3785,4145
12V_PA: C10.1 C12.2 C14.2 IC1.6 IC1.7 IC1.8 IC1.9 IC1.10 J1.4 L2.2 R7.2 R8.2 | length 3206.4
  Top Layer w10: L2.2@3223.75,3775.39 L2.2 L2.2@3226.87,3767.74 ; IC1.6 IC1.7 ; C10.1 v1(3830,2500) 3830,2515 3830,2603.39 3824.14,2609.25 3821.22,2609.25 3820.32,2610.16 IC1.7 ; v1@3880,2575 v1(3879.37,2575.63) IC1.10 IC1.9 IC1.8 IC1.7
  Top Layer w20: L2.2@3223.75,3775.39 C12.2 ; C14.2 L2.2@3226.87,3767.74
  Top Layer w30: R8.2 3726.83,2745.77 R7.2
  Top Layer w40: v1(3125,3770) L2.2 ; J1.4 3180,2415 3205,2440 3800,2440 3830,2470 v1(3830,2500)
  Bottom Layer w30: v1(3730,2745) 3730,2670 3795,2605 3850,2605 v1(3879.37,2575.63)
  Bottom Layer w40: v1(3125,3770) 3075,3720 3075,3440 3580,2935 3580,2720 3800,2500 v1(3830,2500)
  other v1: 3160,3770 3190,3770
DDS_OUT: C15.1 R11.1 U1.21 | length 230.6
  Top Layer w10: C15.1@3352.8,3400.92 C15.1 ; R11.1@3416.87,3403.13 R11.1
  Top Layer w15: C15.1 R11.1@3416.87,3403.13
  Top Layer w17.72: U1.21 C15.1@3352.8,3400.92
DDS_OUTB: R12.1 U1.20 | length 130.8
  Top Layer w10: U1.20 3378.39,3313.39 3395,3330 R12.1
DDS_RST: U1.22 U2.9 | length 923
  Top Layer w10: U2.9 2826,3026.1 2826.5,3025.6 2839.14,3025.6 2845,3031.46 2845,3295 2935,3385 3260,3385 3327.2,3317.8 U1.22@3327.2,3249.76
DDS_WCLK: U1.7@3327.2,2960.24 U2.3 | length 872.4
  Top Layer w10: v1(2752.85,3146.47) 2755.56,3146.47 2757.81,3144.21 U2.3 ; v1(3315,3050) 3327.2,3037.8 U1.7@3327.2,2970.24
  Bottom Layer w10: v1(2752.85,3146.47) 2752.85,3167.68 2749,3171.54 2749,3205.17 2803.83,3260 3105,3260 v1(3315,3050)
GND: C1.1@2685,2978.43 C2.2 C3.2 C4.1 C6.2 C7.2 C8.1 C9.2 C10.2 C11.1 C12.1 C13.1 C14.1 C17.1 C18.1 C19.1 C20.1 C21.1 C22.1 C23.1 C24.1 C25.2 C26.1 C27.2 C28.1 C29.1 C30.1 C31.1 IC1.1 IC2.1 IC2.3 IC2.7 IC2.9 IC2.13 J1.5 L4.2 L4.5 LED.1 R4.1 R5.1 R6.1 R10.1 R11.2 R12.2 R14.2 U1.2@3830.47,3243.23 U1.5@3276.02,2960.24 U1.10 U1.13@3860,3300.31 U1.19 U1.24 U2.7 U3.3 U3.7 VR1.2 Y1.2 | length 299.2
  Top Layer w10: C1.1@2685,2978.43 2687.95,2978.43 2725,3015.47 2725,3032.49 2757.99,3065.47 U2.7 ; U1.2@3830.47,3243.23 3830.47,3271.85 3858.94,3300.31 3860,3300.31 3850.16,3310.16 U1.10@3850.16,3357.4 ; R6.1 R6.1@4055.24,3417.52
  other v1: 2730,2600 2825,2705 2855,2705 3445,2710 2825,2735 2855,2735 3405,2745 2825,2765 2855,2765 3370,2780 2855,2825 2895,2825 3160,2865 3020,2900 2725,2945 3020,2945 3092.14,2945.58 2684.21,2979.32 3094.74,3004.01 3013.43,3235 3486.78,3326.71 3496.77,3400 3925,3490 3295,3555.7 3420,3580.7 3475,3620.7 3140,3625 3344.9,3633.14 3374.76,3633.95 3344.9,3663.16 3375.24,3663.48 3475,3665.7 3140,3670 2645,3685 2685,3685 3140,3710 3420,3710 3985,3715 4025,3715 2645,3730 2685,3730 3475,3755 3985,3760 4025,3760 3420,3810.7 3300,3825.7 3140,3835 3420,3855.7 3300,3870.7 3140,3885 3190,3885 2645,3890 2685,3890 3985,3905 4025,3905 3300,3910.7 3420,3910.7 2645,3935 2685,3935 3985,3950 4025,3950 3185,3960 3240,3960 3300,3960.7 3420,3960.7 3185,4005 3300,4010 3420,4010.7 3185,4055 3300,4065.7 3420,4065.7 2645,4100 2685,4100 3985,4100 4025,4100 3185,4110 3420,4120.7 2645,4145 2685,4145 3985,4145 4025,4145
  other v2: 3820.63,3280.63 3860,3280.63 3899.37,3280.63 3820.63,3320 3860,3320 3899.37,3320
NetC1_2: C1.2@3725.35,3360 U1.12@3810.79,3357.4 | length 96.8
  Top Layer w10: C1.2@3719.43,3370.57 3732.6,3357.4 U1.12@3810.79,3357.4
NetC5_1: C5.1 C6.1 U1.7@3909.21,3357.4 | length 121.7
  Top Layer w10: U1.7@3909.21,3357.4 3961.28,3357.4 3980.79,3376.91 C5.1 4021.02,3378.23 C6.1@4021.38,3377.87
NetC5_2: C5.2 R6.2 | length 37.2
  Top Layer w10: C5.2 3982.59,3412.83 R6.2@4017.28,3412.83
NetC11_2: C11.2 IC1.2 | length 68.5
  Top Layer w10: IC1.2 3859.68,2771.65 3883.03,2795 C11.2
NetC13_2: C13.2 IC2.12 | length 62
  Top Layer w10: C13.2 3244.04,3627.83 IC2.12
NetC15_2: C15.2 C18.2 IC2.2 L6.2 | length 204.8
  Top Layer w10: C18.2 C18.2@3301.22,3509.13 ; IC2.2 3360.08,3519.06 L6.2
  Top Layer w15: C18.2@3301.22,3509.13 3355,3509.13 C15.2
NetC16_1: C16.1 C17.2 IC2.8 L2.1 | length 175
  Top Layer w10: L2.1 3300,3768.88 L2.1@3310.75,3758.13 ; C16.1 C16.1 ; IC2.8 3360.04,3705.04 C16.1 ; C16.1@3361.56,3756.56 C16.1 ; C17.2@3413.44,3756.56 C17.2
  Top Layer w20: L2.1@3310.75,3758.13 C16.1 ; C16.1@3361.56,3756.56 C17.2@3413.44,3756.56
NetC16_2: C16.2 R9.1 | length 70.5
  Top Layer w30: C16.2 R9.1
NetIC1_3: IC1.3 R3.1 U2.10 | length 1810.3
  Top Layer w10: U2.10 2853.58,3006.42 2880.83,2979.17 2880.83,2964.17 v1(2910,2935) ; v1(3510,2890) 3681.35,2890 3691.35,2900 3860,2900 ; IC1.3 3840,2880 3860,2900 ; R3.1 4005.79,3050.79 3915,2960 3915,2910.86 3905,2900.86 v1(3905,2900) 3860,2900
  Bottom Layer w10: v1(2910,2935) 2984.14,2935 2990,2940.86 2990,3095 3020,3125 3130,3125 3270,2985 3390,2985 3485,2890 v1(3510,2890)
NetIC1_4: IC1.4 R8.1 | length 102.1
  Top Layer w10: R8.1@3796.33,2830 3796.33,2829.47 3809.74,2816.06 3810.27,2816.06 3820.32,2806.02 IC1.4
NetL1_2: L1.2 U1.1@3810.79,3243.23 | length 188.3
  Top Layer w10: L1.2 3742.48,3166.22 3810.79,3234.53 U1.1@3810.79,3243.23
NetL3_1: L3.1 L4.3 L5.2 | length 323.4
  Top Layer w10: L5.2@3336.61,4231.03 L5.2
  Top Layer w20: L5.2@3336.61,4231.03 3360,4207.64
  Top Layer w30: L4.3 3360,4207.64
  Top Layer w40: L5.2 3435,4235 3470,4270 L3.1
NetL3_2: L3.2 pad.2@3465,4465
NetL4_1: L4.1 L5.1 L7.2 | length 325.5
  Top Layer w10: L5.1@3281.52,4236.87 L5.1 L5.1@3283.39,4231.03
  Top Layer w20: 3260,4207.64 L5.1@3283.39,4231.03
  Top Layer w30: L4.1 3260,4207.64
  Top Layer w40: L7.2 3150,4275 3188.13,4236.87 L5.1@3281.52,4236.87
NetL4_4: L4.4 R9.2 | length 79.9
  Top Layer w20: R9.2 L4.4
NetL6_1: L6.1 R10.2 | length 58.6
  Top Layer w10: L6.1 L6.1@3440,3520
  Top Layer w15: L6.1@3440,3520 R10.2
NetL7_1: L7.1 pad.2@3150,4470
NetLED_2: LED.2 R15.1 | length 60.5
  Top Layer w10: R15.1 LED.2@4048.62,3541.58
NetR1_1: R1.1@3660.8,2620 R4.2 U1.8@3889.53,3357.4 | length 1037.7
  Top Layer w10: R1.1@3670,2627.15 R1.1@3677.15,2620 ; U1.8@3889.53,3357.4 3889.53,3384.53 3903.09,3398.09 3908.09,3398.09 v1(3910,3400) 3910,3402.71 3919.81,3412.52 3919.81,3432.52 3917.2,3432.52 R4.2@3925,3440.31
  Top Layer w20: R1.1@3670,2627.15 v1(3670,2705)
  Bottom Layer w30: v1@3669.5,2706.83 3669.5,3249.5 3820,3400 v1(3910,3400)
NetR2_2: R2.2 U1.9@3869.84,3357.4 | length 631.2
  Top Layer w10: U1.9@3869.84,3357.4 3869.84,3434.14 3880,3444.3 v1(3880,3445) ; v1(3925,3030) 3925,3082.24 R2.2
  Bottom Layer w20: v1(3880,3445) 3920,3445 3960,3405 3960,3065 v1(3925,3030)
NetR3_2: R3.2 U1.4@3869.84,3243.23 | length 206.1
  Top Layer w10: U1.4@3869.84,3243.23 3869.84,3225.16 3915,3180 3999.93,3180 4005.79,3174.14 R3.2
NetR5_2: R5.2 U1.6@3909.21,3243.23 | length 63.9
  Top Layer w10: U1.6@3909.21,3243.23 3930.45,3243.23 3950.02,3262.8 R5.2@3965,3262.8
NetR14_1: R14.1 U1.15 U1.16 | length 126.7
  Top Layer w10: U1.16 U1.15 3529.83,3263.25 R14.1
NetU1_1: U1.1@3173.66,2960.24 U2.17 | length 300.6
  Top Layer w10: U2.17 3086.89,3124.53 3173.66,3037.76 U1.1@3173.66,2970.24
NetU1_2: U1.2@3199.25,2960.24 U2.18 | length 340.4
  Top Layer w10: U2.18 3103.03,3144.21 3198.37,3048.88 3198.37,2971.12 U1.2@3199.25,2970.24
NetU1_3: U1.3@3224.84,2960.24 U2.19 | length 381.2
  Top Layer w10: U2.19 3121.1,3163.9 3224.84,3060.16 U1.3@3224.84,2970.24
NetU1_4: U1.4@3250.43,2960.24 U2.20 | length 423.4
  Top Layer w10: U2.20 3141.42,3183.58 3250.43,3074.57 U1.4@3250.43,2970.24
NetU1_8: U1.8@3352.8,2960.24 U2.4 | length 988.7
  Top Layer w10: v1(2725,3129.84) 2727.71,3129.84 2736.08,3121.47 2768.53,3121.47 2771.1,3124.03 2803,3124.03 U2.4 ; v1(2945,2965) 2945,2915 3055,2805 3265,2805 3352.8,2892.8 U1.8@3352.8,2970.24
  Bottom Layer w10: v1(2725,3129.84) 2750,3104.84 2805.16,3104.84 v1(2945,2965)
NetU1_9: U1.9@3378.39,2960.24 Y1.3 | length 360.3
  Top Layer w10: Y1.3 3261.5,2751.5 3378.39,2868.39 U1.9@3378.39,2970.24
NetU1_12: U1.12@3455.16,2960.24 VR1.1 | length 357.3
  Top Layer w10: U1.12@3455.16,2960.24 3455.16,2879.84 3505,2830 VR1.1@3505,2623.57
NetU1_25: U1.25 U2.11 | length 868.3
  Top Layer w10: U2.11 2895.3,3006.42 2865,3036.72 2865,3285 2935,3355 3210,3355 3250.43,3314.57 U1.25@3250.43,3249.76
NetU1_26: U1.26 U2.12 | length 761.6
  Top Layer w10: 2903.9,3026.1 U2.12 ; 2903.9,3026.42 2903.58,3026.42 2885,3045 2885,3270 2950,3335 3200,3335 3224.84,3310.16 U1.26@3224.84,3249.76
NetU1_27: U1.27 U2.13 | length 648.2
  Top Layer w10: 2919.21,3045.79 U2.13 ; 2919.21,3046.1 2918.9,3046.1 2905,3060 2905,3255 2965,3315 3185,3315 3199.25,3300.75 U1.27@3199.25,3249.76
NetU1_28: U1.28 U2.14 | length 521.9
  Top Layer w10: U2.14 2935.39,3065.47 2929.53,3071.33 2929.53,3244.53 2980,3295 3154.88,3295 3173.66,3276.22 U1.28@3173.66,3249.76
NetU2_8: U2.8 Y1.1 | length 605.8
  Top Layer w10: U2.8 2760.86,3045.79 2755,3039.93 2755,2975 2780,2950 2850,2950 2972.42,2827.58 2972.42,2761.36 3038.77,2695.01 Y1.1@3090.19,2695.01
RST: J1.8 R1.1@2737.44,2890 U2.5 | length 1682.1
  Top Layer w10: R1.1@2737.44,2890 2677.43,2890 2666.91,2900.51 2666.91,2918.09 v1(2665,2920) 2640,2945 2640,3065 2679.84,3104.84 U2.5
  Bottom Layer w10: v1(2665,2920) 2665,2805 2800,2670 3330,2670 3578.09,2421.91 3578.09,2386.53 3592.6,2372.02 J1.8@3601.48,2372.02
RXD: J1.6 U2.1 | length 1553.7
  Top Layer w10: v1(2640,3140) 2640,3165 2665,3190 2765.89,3190 2771.81,3184.08 2803,3184.08 U2.1
  Bottom Layer w10: v1(2640,3140) 2605,3105 2605,2780 2805,2580 3215,2580 3380,2415 J1.6
SWCLK: J1.10 U2.16 | length 1140.7
  Top Layer w10: U2.16 3060.16,3104.84 v1(3080,3085)
  Bottom Layer w10: v1(3080,3085) 3115,3085 3535.39,2664.61 3535.82,2664.61 3544.61,2655.82 3544.61,2655.39 3775,2425 J1.10@3775,2364.65
SWDIO: J1.9 U2.15 | length 1164.1
  Top Layer w10: U2.15 3024.84,3085.16 v1(3050,3060)
  Bottom Layer w10: v1(3050,3060) 3050,2818.54 3106.69,2761.85 3106.69,2738.31 3140,2705 3345,2705 J1.9@3686.49,2363.51
TXD: J1.7 U2.2 | length 1557.2
  Top Layer w10: v1(2675,3160) 2731.03,3160 2742.5,3171.47 2763.21,3171.47 2770.28,3164.4 2803,3164.4 U2.2
  Bottom Layer w10: v1(2675,3160) 2675,3105 2635,3065 2635,2795 2805,2625 3245,2625 3471.48,2398.52 3471.48,2372.02 J1.7
VBAT: C4.2 C25.1 J1.1 L1.1 R2.1 U1.3@3850.16,3243.23 U3.5 U3.6 | length 3148.7
  Top Layer w10: C25.1 2725,2700.2 U3.6 U3.5 ; L1.1 3835.79,3200.79 3850.16,3215.16 ; U1.3@3850.16,3243.23 3850.16,3215.16 ; R2.1 3911.92,3152.09 3911.92,3153.39 3850.16,3215.16
  Top Layer w30: v1(3835.12,2950) L1.1@3835.12,3082.56
  Top Layer w40: C25.1 2685,2700 2630,2645 2630,2440 2706.49,2363.51 J1.1
  Bottom Layer w40: J1.1 2880,2305 2972.5,2212.5 3937.5,2212.5 4060,2335 4060,2610 3835.12,2834.88 v1(3835.12,2950)
VCC: C7.1 U1.5@3889.53,3243.23 | length 165.5
  Top Layer w10: U1.5@3889.53,3243.23 3889.61,3243.15 3889.61,3229.99 3909.36,3210.23 4003.47,3210.23 4009.33,3216.09 4009.33,3217.83 4020.08,3228.58 C7.1
pads on no net: IC1.5 IC2.4 IC2.5 IC2.6 IC2.10 IC2.11 U1.13@3480.75,2960.24 U1.14 U1.17 U3.4 VR1.3

## Polygon pours and split planes (outlines as drawn)
3V3 on VCC "3V3_L03_P000" (solid, pour order 0): 2575,3345 2575,2130 4090,2130 4090,3345
12V on VCC "12V_L03_P006" (solid, pour order 6): 2575,4600 2575,3405 4090,3405 4090,4600
GND on Top Layer "GND_L01_P007" (solid, pour order 7): 2575,4600 4090,4600 4090,2130 2575,2130
12V on Top Layer "12V_L01_P004" (solid, pour order 4): 3570,4265 3865,4265 3865,3465 3570,3465
12V on Top Layer "12V_L01_P003" (solid, pour order 3): 2755,4265 3050,4265 3050,3465 2755,3465
GND on GND "GND_L02_P008" (solid, pour order 8): 2575,4600 4090,4600 4090,2130 2575,2130
12V_PA on GND "12V_PA_L02_P001" (solid, pour order 1): 2575,4600 2575,3405 4090,3405 4090,4600
GND on Bottom Layer "GND_L04_P005" (solid, pour order 5): 2575,4600 4090,4600 4090,2130 2575,2130

## Silkscreen, mask and mechanical layers (free items; w line width, h text height)
Mechanical 1:
  the board outline again, w0

## Text inside footprints (layer, text, board x,y; h text height)
U2: Top 3D Body "*" at 2831.5,3144.5 h50; Top Overlay "*" at 2781,3189.58 h50